# Altium PCB PCB1.PcbDoc
Units mm, origin at the board's own origin, x right, y up, seen from the top; angles counter-clockwise.
Board outline 50 x 45 mm, 2 copper layers (Top Layer, Bottom Layer); 4 components, 7 nets, 21 pads, 0 vias.
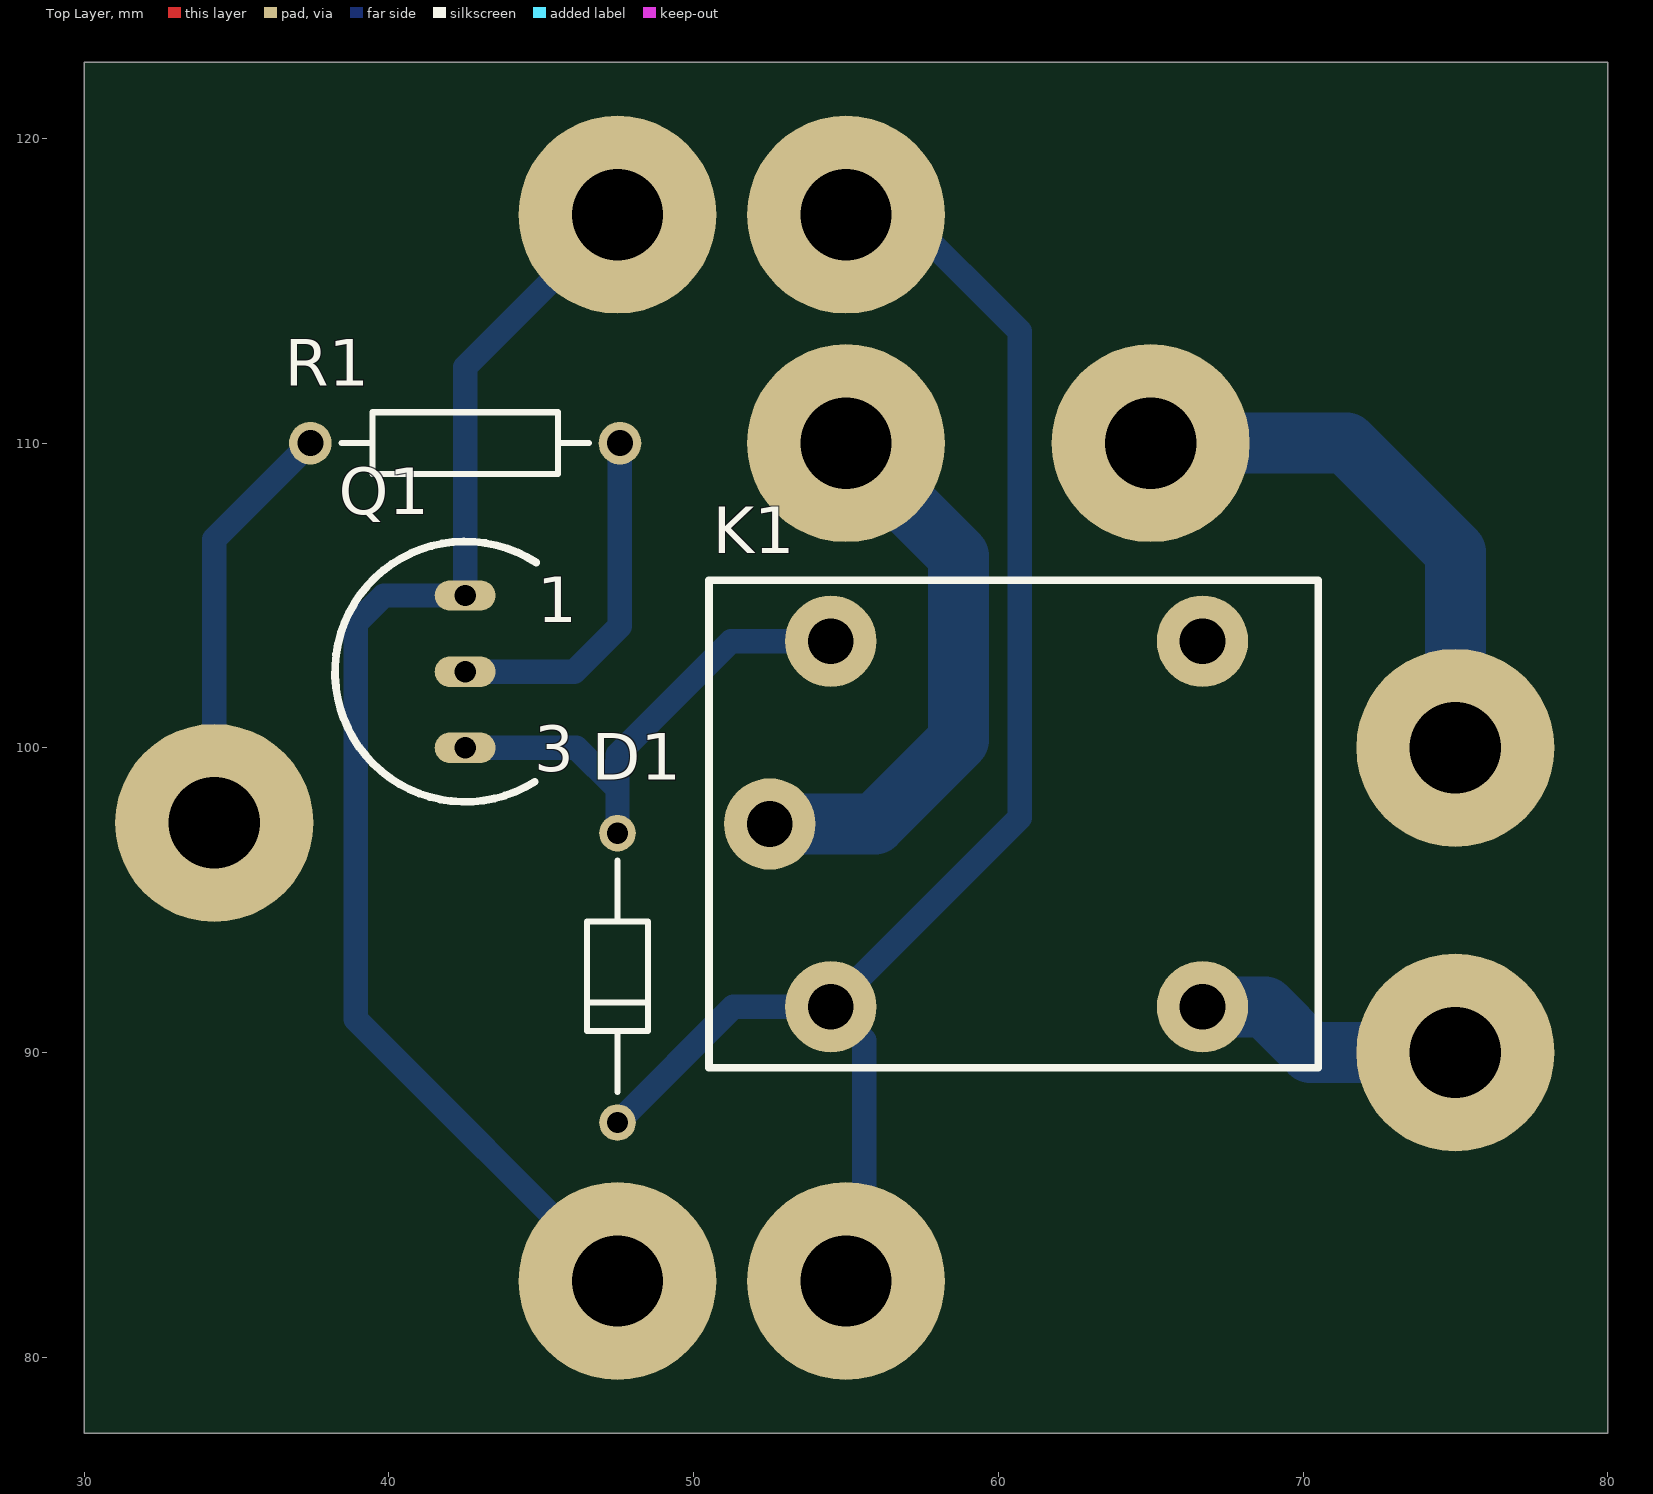
[diagram p0: Top Layer view]
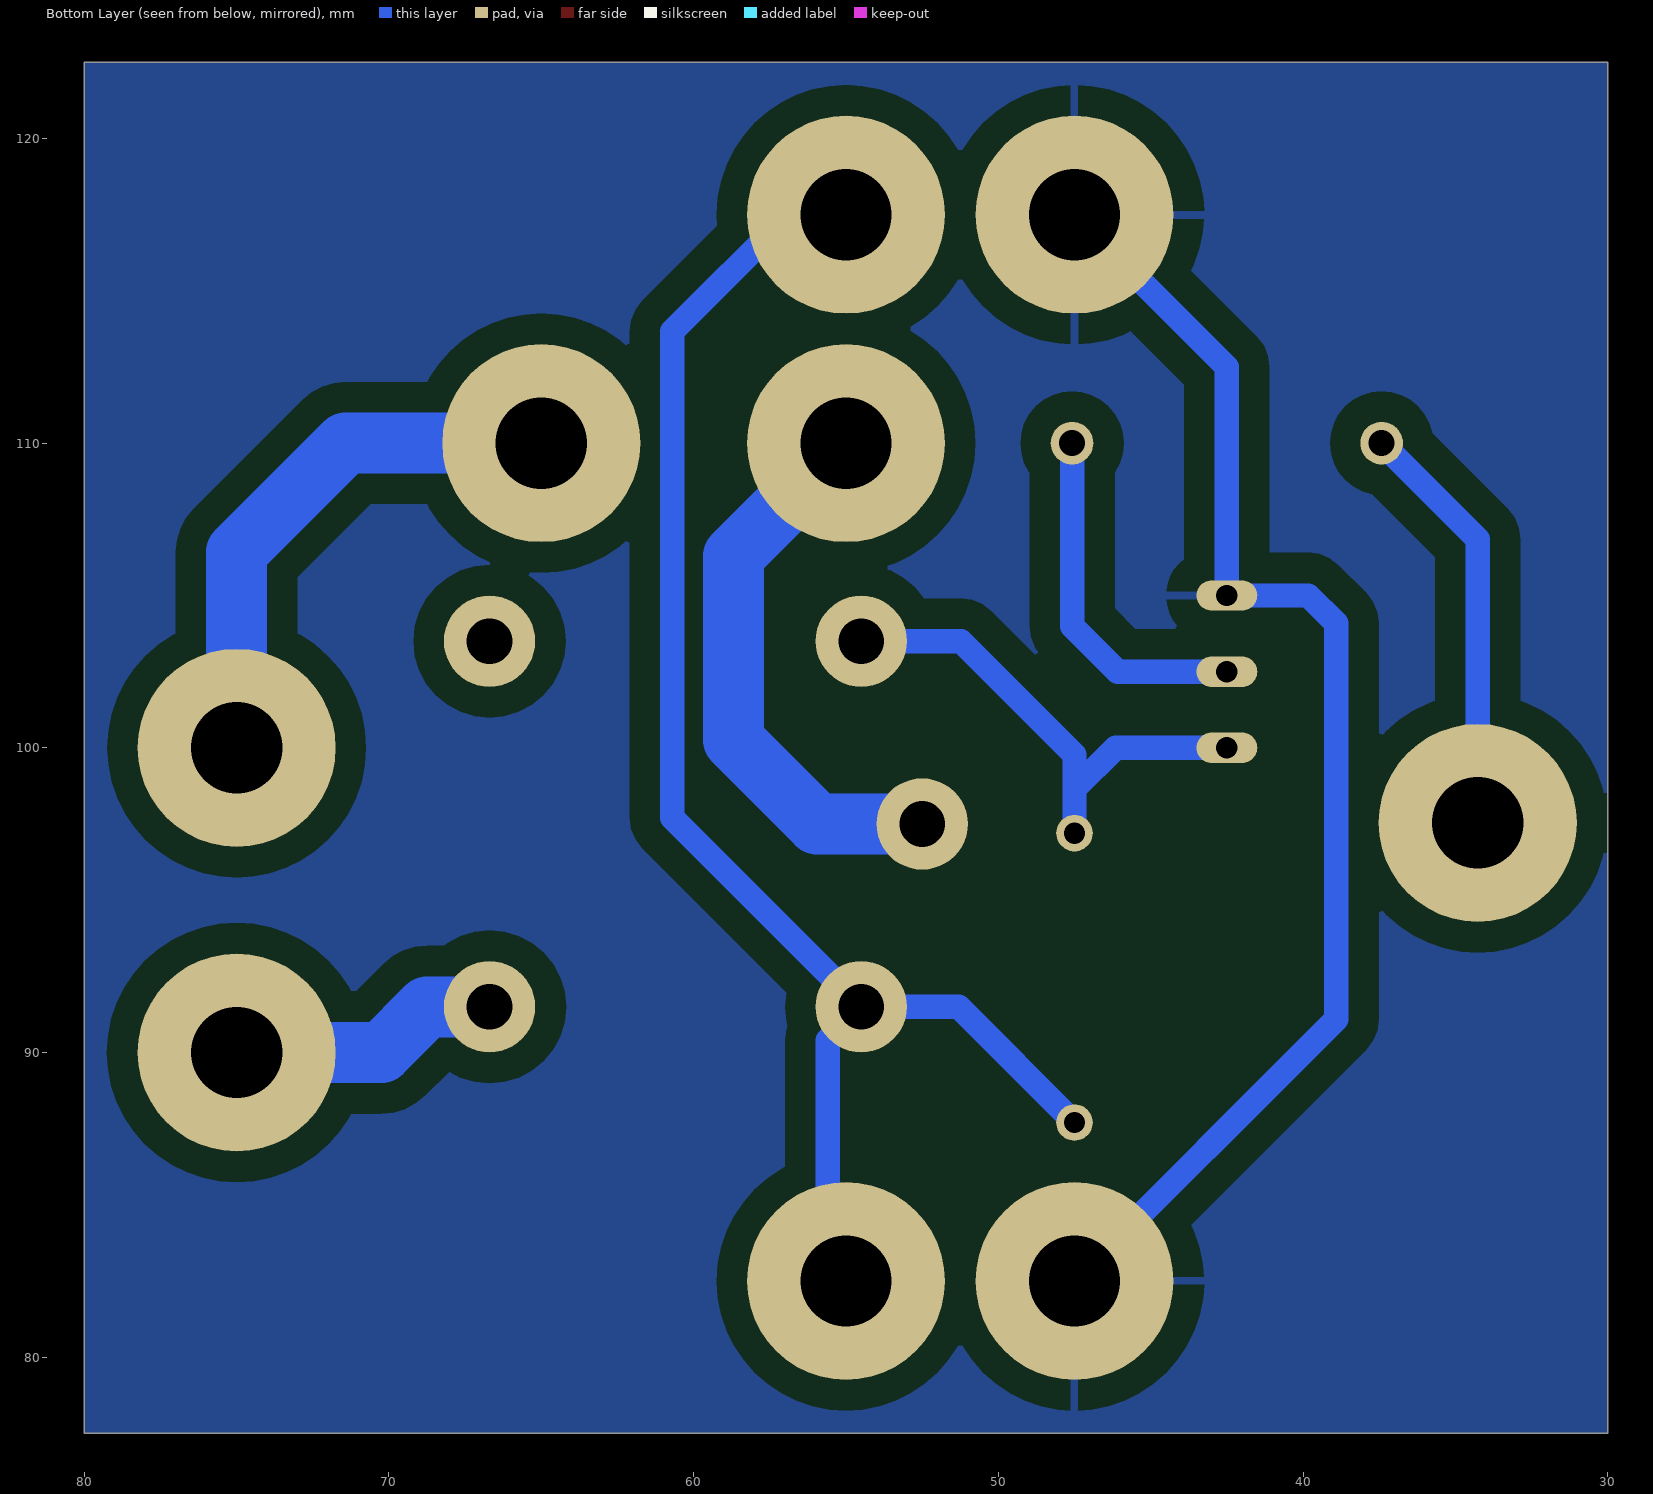
[diagram p1: Bottom Layer view, seen from below]

## Layer stack, top to bottom
Top Layer: signal copper 0.0356
Dielectric: dielectric 0.32, FR-4, Dk 4.8
Bottom Layer: signal copper 0.0356

## Board outline
80,77.5 80,122.5 30,122.5 30,77.5

## Design rules (kind name [scope] priority, off if disabled: settings)
Clearance Clearance_1 [IsRegion] p1: gap=1
Clearance [Not HasFootprint('LED')] p2: gap=0.6
PolygonConnect [All] p1: connectstyle=Relief reliefconductorwidth=0.254 reliefentries=4 polygonreliefangle="90 Angle"
RoutingVias [All] p1: holewidth=0.711 width=1.27 viastyle="Through Hole" minholewidth=0.711 minwidth=1.27 maxholewidth=0.711 maxwidth=1.27
SilkscreenOverComponentPads [All] p1: minsilkscreentomaskgap=0.254
SolderMaskExpansion SolderMaskExpansion_1 [HasFootprint('LED')] p1: expansion=0.15
SolderMaskExpansion [Not HasFootprint('LED')] p2: expansion=0.4
Width [All] p1: maxlimit=2 minlimit=0.6 preferedwidth=0.8
27 further rules are at their usual default settings.

## Components (designator, comment, footprint, x,y, rotation, side; value= is the part's Value field where it differs from the comment)
D1 "Diode" DO-35 47.5,92.5 r270 top
K1 "Relay-SPDT" relay 47.5,92.5 r0 top
Q1 "BC548" TO-92 42.5,102.5 r0 top
R1 "Res2" AXIAL-0.4 42.5,110 r180 top

## Footprints (in the part's own frame and the unit in brackets; to place one, negate y for a bottom-side part, rotate by r counter-clockwise, add the part's x,y. Pads: shape width x height; smd on the part's side, far side on the other; paste and mask are expansions set on the pad)
AXIAL-0.4 [mm] "Axial Device, Thru-Hole; 2 Leads; 0.4 in Pin Spacing"
  round 1.4 hole 0.85: 1(-5.08,0) 2(5.08,0)
  silkscreen extent -4.06,-1.02 4.06,1.02
DO-35 [mm] "PHF - 2015-07-20"
  round 1.2 hole 0.7: 1(-4.7,0) 2(4.8,0)
  silkscreen extent -3.8,-1 3.8,1
relay [mm]
  round 3 hole 1.5: 1(5,5) 2(19.2,11) 3(19.2,-1) 4(7,-1) 5(7,11)
  silkscreen extent 3,-3 23,13
TO-92 [mm] "TO, Flat Index; 3 In-Line, Axial Leads; Body Dia. 4.6mm; Leads 0.41 x 0.39 mm (max)"
  oval 2x1 hole 0.7: 1(0,2.5) 2(0,0) 3(0,-2.5)
  silkscreen extent -4.27,-4.27 2.33,4.27

## Part data
D1: "Default Diode"
K1: "Single-Pole Dual-Throw Relay"
Q1: "NPN General Purpose Amplifier"
R1: "Resistor"

## Free pads (board coordinates)
  round 6.5 hole 3: 0(47.5,117.5) 1(55,117.5) 2(47.5,82.5) 3(55,82.5) 4(34.265,97.536) 5(75,90) 6(75,100) 7(65,110) 8(55,110)

## Nets (pads, with @x,y where several pads share a name; then routed paths per layer and width w, separated by ;. In a path a pad name is that pad's centre, name@x,y a point inside that pad or via, vN(x,y) a via of type N, cw(c..) or ccw(c..) an arc to the next point about the centre after c; other vN are vias at no path point)
GND: pad.0 pad.2 Q1.1 | length 43.7
  Bottom Layer w0.8: pad.2 38.913,91.087 38.913,104.089 39.824,105 Q1.1 42.5,112.5 pad.0
IN: pad.4 R1.2 | length 13.8
  Bottom Layer w0.8: pad.4 34.265,106.845 R1.2
NetD1_1: D1.1 K1.5 Q1.3 | length 16.7
  Bottom Layer w0.8: Q1.3 46.152,100 47.5,98.652 ; D1.1 47.5,98.652 ; K1.5 51.227,103.5 47.5,99.773 47.5,98.652
NetQ1_2: Q1.2 R1.1 | length 11.7
  Bottom Layer w0.8: Q1.2 46.087,102.5 47.58,103.993 R1.1
TOMADA2: K1.3 pad.5 | length 8.9
  Bottom Layer w2: K1.3 68.749,91.5 70.249,90 pad.5
TOMADA3: K1.1 pad.8 | length 18.6
  Bottom Layer w2: K1.1 55.946,97.5 58.699,100.254 58.699,106.301 pad.8
VCC: D1.2 K1.4 pad.1 pad.3 | length 50.3
  Bottom Layer w0.8: D1.2 51.3,91.5 K1.4 ; pad.3 55.601,83.101 55.601,90.399 K1.4 ; pad.1 56.871,117.5 60.699,113.672 60.699,97.699 K1.4
pads on no net: K1.2
copper on no net: | length 17.9
  Bottom Layer w0.8: 65,110 65.423,110
  Bottom Layer w2: 65.423,110 71.432,110 75,106.432 75,100

## Polygon pours and split planes (outlines as drawn)
GND on Bottom Layer "GND" (solid, remove dead copper, pour order 3): 30,77.5 80,77.5 80,122.5 30,122.5

## Text inside footprints (layer, text, board x,y; h text height)
Q1: Top Overlay "1" at 44.862,104.126 h1.5; Top Overlay "3" at 44.761,99.223 h1.5